# Altium PCB STM32F103C8T6_MinimumCoreBoard.PcbDoc
Units mil, origin at the board's own origin, x right, y up, seen from the top; angles counter-clockwise.
Board outline 1112.39 x 2027.75 mil, 2 copper layers (Top Layer, Bottom Layer); 35 components, 50 nets, 170 pads, 39 vias.
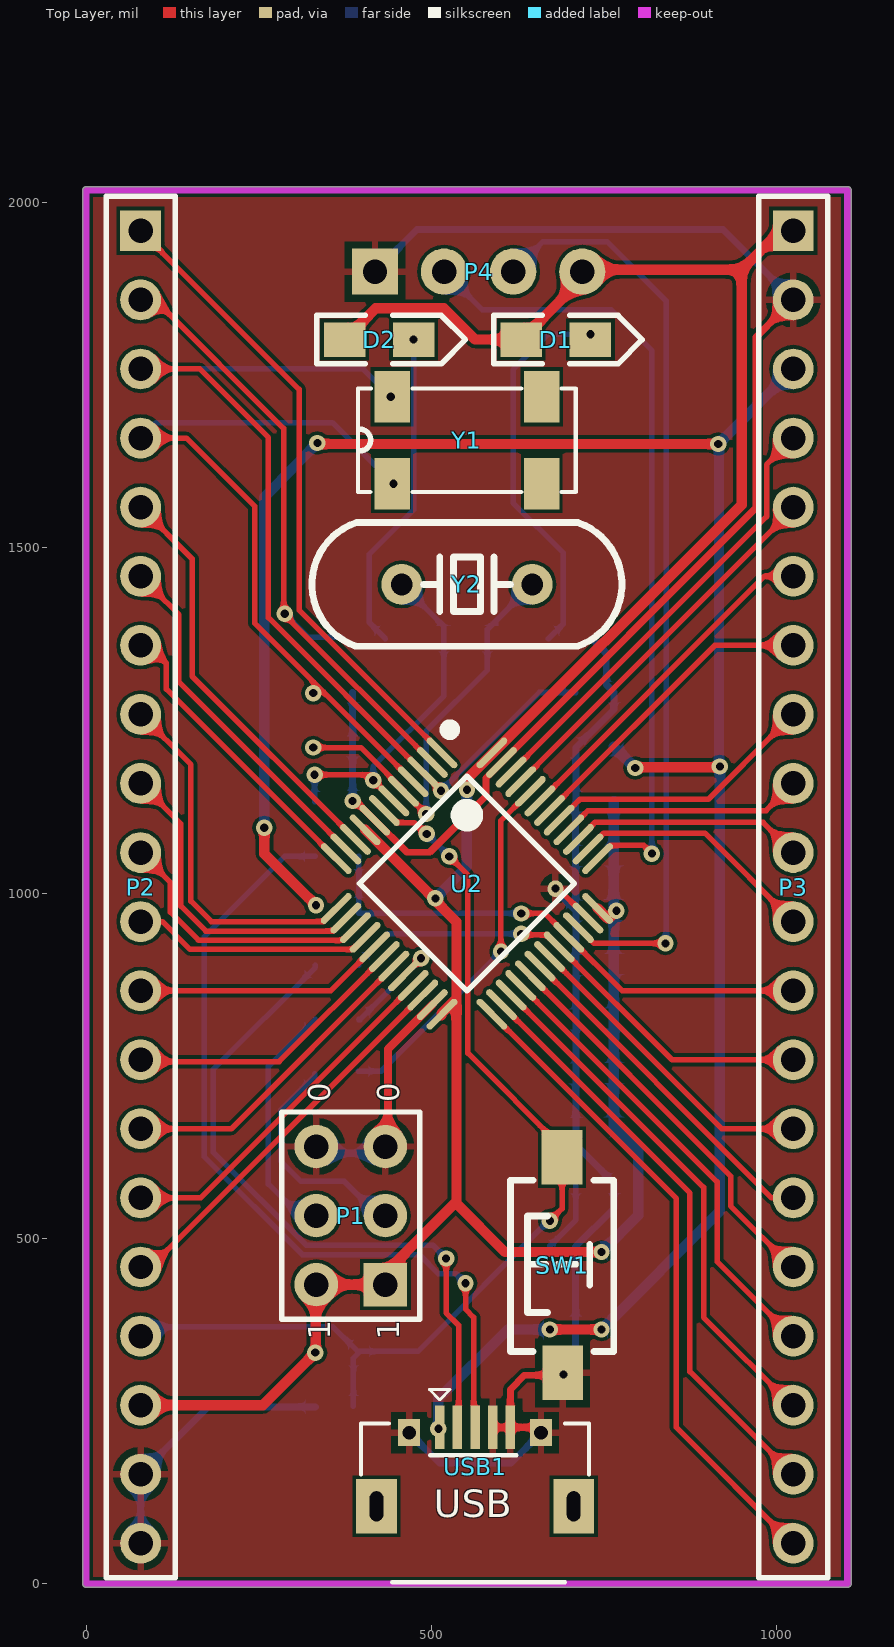
[diagram p0: Top Layer view]
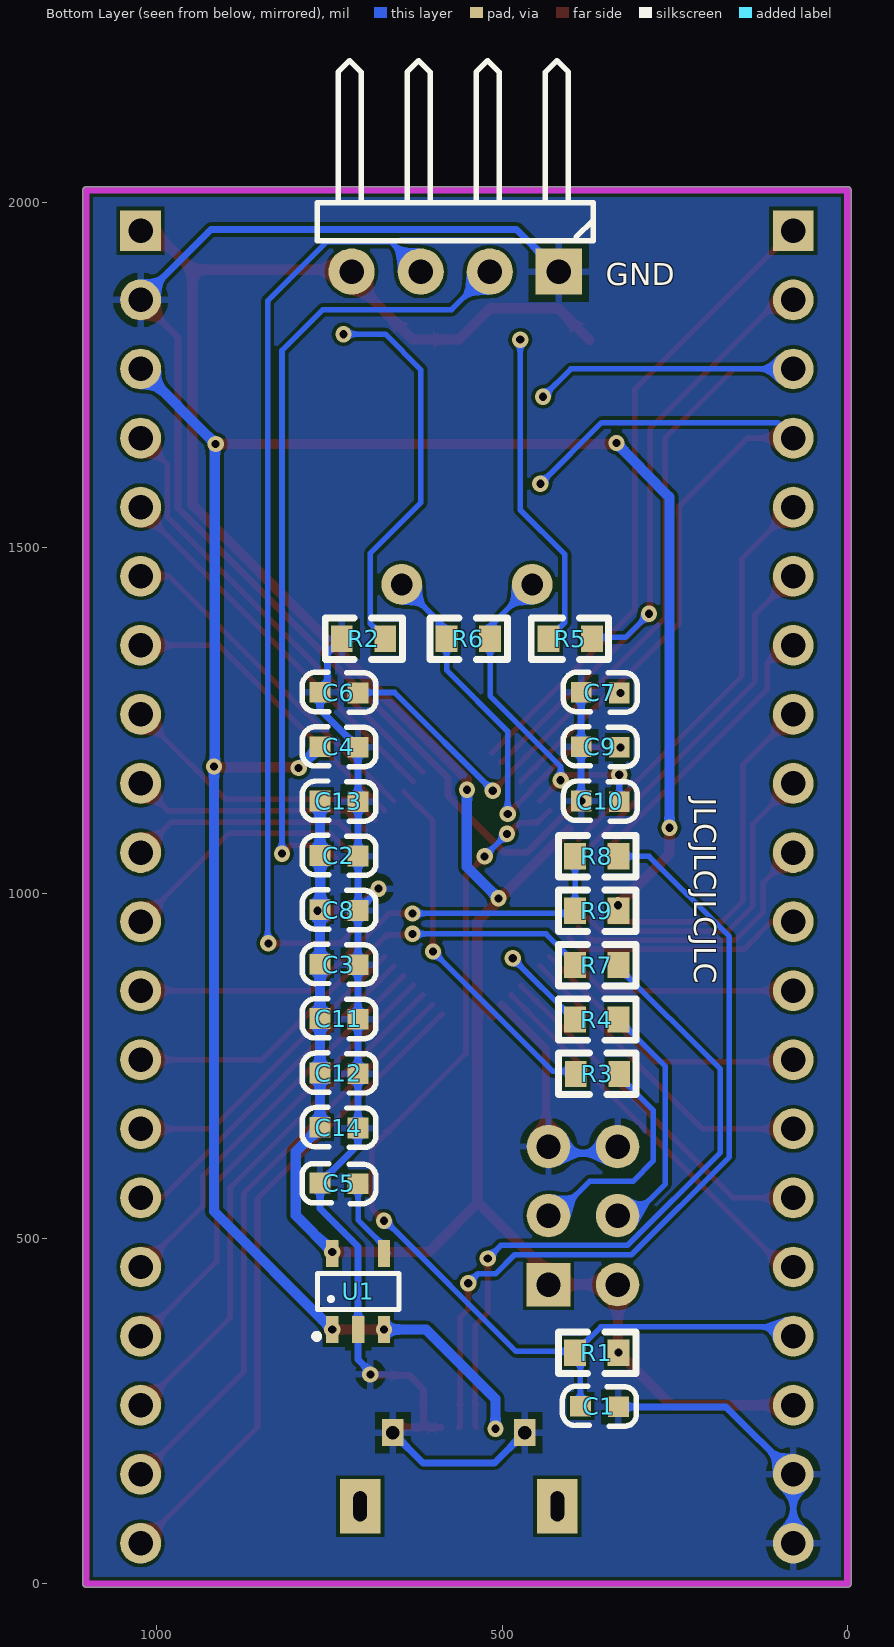
[diagram p1: Bottom Layer view, seen from below]

## Layer stack, top to bottom
Top Solder: solder mask 0.4, Solder Resist, Dk 3.5
Top Layer: signal copper 1.4
Dielectric 1: dielectric 12.6, FR-4, Dk 4.8
Bottom Layer: signal copper 1.4
Bottom Solder: solder mask 0.4, Solder Resist, Dk 3.5

## Board outline
0,-5.01 cw(c0,0) -5.01,0 -5.01,2017.72 cw(c0,2017.72) 0,2022.73 1102.36,2022.73 cw(c1102.36,2017.72) 1107.38,2017.72 1107.38,0 cw(c1102.36,0) 1102.36,-5.01

## Design rules (kind name [scope] priority, off if disabled: settings)
Clearance [All] p1: gap=5 ignorepadtopadclearanceinfootprint=TRUE
ComponentClearance ComponentClearance_1 [InComponent('OLED1')] p1: gap=0 collisioncheckmode=3 verticalgap=0 showdistances=FALSE
ComponentClearance [All] p2: gap=10 collisioncheckmode=3 verticalgap=10 showdistances=FALSE
DiffPairsRouting [All] p1: maxlimit=10 minlimit=3.5 mostfreqgap=8 toplayer_minwidth=3.5 toplayer_maxwidth=15 toplayer_prefwidth=8 bottomlayer_minwidth=3.5 bottomlayer_maxwidth=15 bottomlayer_prefwidth=8 maxuncoupledlength=500
MinimumSolderMaskSliver [All] p1: minsoldermaskwidth=0
PolygonConnect [All] p1: connectstyle=Relief reliefconductorwidth=10 reliefentries=4 polygonreliefangle="90 Angle" airgapwidth=10
RoutingVias [All] p1: holewidth=28 width=50 viastyle="Through Hole" minholewidth=11.81 minwidth=19.68 maxholewidth=248.03 maxwidth=50
SilkToSilkClearance [All] p1: silktosilkclearance=0
SilkToSolderMaskClearance [IsPad] p1: minsilkscreentomaskgap=0 clearancetoexposedcopper=TRUE
SolderMaskExpansion [All] p1: expansion=4
UnpouredPolygon [All] p1: allowunpoured=TRUE allowshelved=TRUE
Width [All] p1: maxlimit=15 minlimit=3.5 preferedwidth=8
24 further rules are at their usual default settings.

## Components (designator, comment, footprint, x,y, rotation, side; value= is the part's Value field where it differs from the comment)
C1 "1uF/0603" 0603C 331.69,255.91 r0 bottom
C2 "10uF/0603" 0603C 708.66,1053.15 r0 bottom
C3 "0.1uF/0603" 0603C 708.66,895.67 r0 bottom
C4 "1uF/0603" 0603C 708.66,1210.63 r0 bottom
C5 "22nF/0603" 0603C 764.02,580.71 r180 bottom
C6 "22pF/0603" 0603C 708.66,1289.37 r0 bottom
C7 "22pF/0603" 0603C 330.61,1289.37 r0 bottom
C8 "0.1uF/0603" 0603C 708.66,974.41 r0 bottom
C9 "22pF/0603" 0603C 330.61,1210.63 r0 bottom
C10 "22pF/0603" 0603C 330.5,1131.89 r0 bottom
C11 "1uF/0603" 0603C 708.66,816.93 r0 bottom
C12 "1uF/0603" 0603C 708.66,738.19 r0 bottom
C13 "1uF/0603" 0603C 708.66,1131.89 r0 bottom
C14 "1uF/0603" 0603C 708.66,659.45 r0 bottom
D1 "LEDR/0805" LED-0805R 629.92,1801.18 r0 top
D2 "LEDY/0805" LED-0805Y 374.02,1801.18 r0 top
P1 "Header 3X2" HDR-3X2 433.07,433.07 r90 top
P2 "Header 20" HDR1X20 78.74,1958.66 r270 top
P3 "Header 20" HDR1X20 1023.62,1958.66 r270 top
P4 "SWD" HDR-1X4_H 418.11,1899.61 r0 top
R1 "10K/0603" 0603R 331.69,334.65 r0 bottom
R2 "510R/0603" 0603R 669.29,1368.11 r0 bottom
R3 "10K/0603" 0603R 393.7,738.19 r180 bottom
R4 "10K/0603" 0603R 331.7,816.93 r0 bottom
R5 "510R/0603" 0603R 433.07,1368.11 r180 bottom
R6 "1M/0603" 0603R 517.72,1368.11 r0 bottom
R7 "20R/0603" 0603R 331.69,895.67 r0 bottom
R8 "20R/0603" 0603R 331.69,1053.15 r0 bottom
R9 "4.7K/0603" 0603R 331.69,974.41 r0 bottom
SW1 "SW-PB_V" "TSW SMD-3*6*2.5" 688.98,462.6 r90 top
U1 "RT9193" SOT23-5L 708.66,423.23 r180 bottom
U2 "STM32F103C8T6" "TQFP48 7x7_L" 551.18,1013.78 r225 top
USB1 "Micro-USB" USB-micro_B 511.81,226.38 r0 top
Y1 "32.768K" MC-306 551.18,1655.51 r0 top
Y2 "8M" "XTAL-49S DIP" 551.18,1446.85 r0 top

## Footprints (in the part's own frame and the unit in brackets; to place one, negate y for a bottom-side part, rotate by r counter-clockwise, add the part's x,y. Pads: shape width x height; smd on the part's side, far side on the other; paste and mask are expansions set on the pad)
0603C [mil]
  rect 30x30 smd: 1(0.21,-0.35) 2(55.21,-1.35)
  silkscreen extent -26,-30 81,28, body extent -1,-15 62,16, height 12
0603R [mm]
  rect 0.8x0.965 smd: 1(0,0) 2(1.6,0)
  silkscreen extent -0.64,-0.76 2.21,0.76, body extent -0.04,-0.41 1.56,0.41, height 0.45
HDR1X20 [mm] "Connector; Header; 20 Position"
  rect 1.5x1.5 hole 0.9: 1(0,0)
  round 1.5 hole 0.9: 2(2.54,0) 3(5.08,0) 4(7.62,0) 5(10.16,0) 6(12.7,0) 7(15.24,0) 8(17.78,0) 9(20.32,0) 10(22.86,0) 11(25.4,0) 12(27.94,0) 13(30.48,0) 14(33.02,0) 15(35.56,0) 16(38.1,0) 17(40.64,0) 18(43.18,0) 19(45.72,0) 20(48.26,0)
  silkscreen extent -1.27,-1.27 49.53,1.27
HDR-1X4_H [mm] "弯脚排针，4脚"
  rect 1.7x1.7 hole 0.9: 1(0,0)
  round 1.7 hole 0.9: 2(2.54,0) 3(5.08,0) 4(7.62,0)
  body extent -1.27,-1.27 8.89,7.77, height 4.85
HDR-3X2 [mm] "双排排针，3x2脚"
  rect 1.6x1.6 hole 0.9: 1(0,0)
  round 1.6 hole 0.9: 2(0,2.54) 3(2.54,0) 4(2.54,2.54) 5(5.08,0) 6(5.08,2.54)
  silkscreen extent -1.27,-1.27 6.35,3.81, body extent -1.27,-1.27 6.35,3.81, height 8.5
LED-0805R [mil]
  rect 60x50 smd: A(0,0) K(100,0)
  silkscreen extent -40,-35 175,35, body extent 11,-24 89,25, height 32
LED-0805Y [mil]
  rect 60x50 smd: A(0,0) K(100,0)
  silkscreen extent -40,-35 175,35, body extent 11,-26 89,23, height 32
MC-306 [mm]
  rect 1.3x1.9 smd: 1(-2.75,-1.6) 2(2.75,-1.6) 3(2.75,1.6) 4(-2.75,1.6)
  silkscreen extent -4,-1.9 4,1.9
SOT23-5L [mm] "3x1.6x1.1mm(长宽高)"
  rect 0.45x1 smd: 1(-0.95,-1.4) 2(0,-1.4) 3(0.95,-1.4) 4(0.95,1.4) 5(-0.95,1.4)
  silkscreen extent -1.6,-1.73 1.5,0.66, body extent -1.5,-1.4 1.5,1.4, height 1.15
"TQFP48 7x7_L" [mm] "48脚，体宽：7x7mm, 脚距：0.5mm"
  oval 0.25x1.5 smd: 1(-2.75,-4.046) 2(-2.25,-4.046) 3(-1.75,-4.046) 4(-1.25,-4.046) 5(-0.75,-4.046) 6(-0.25,-4.046) 7(0.25,-4.046) 8(0.75,-4.046) 9(1.25,-4.046) 10(1.75,-4.046) 11(2.25,-4.046) 12(2.75,-4.046) 25(2.75,4.046) 26(2.25,4.046) 27(1.75,4.046) 28(1.25,4.046) 29(0.75,4.046) 30(0.25,4.046) 31(-0.25,4.046) 32(-0.75,4.046) 33(-1.25,4.046) 34(-1.75,4.046) 35(-2.25,4.046) 36(-2.75,4.046)
  oval 1.5x0.25 smd: 13(4.046,-2.75) 14(4.046,-2.25) 15(4.046,-1.75) 16(4.046,-1.25) 17(4.046,-0.75) 18(4.046,-0.25) 19(4.046,0.25) 20(4.046,0.75) 21(4.046,1.25) 22(4.046,1.75) 23(4.046,2.25) 24(4.046,2.75) 37(-4.046,2.75) 38(-4.046,2.25) 39(-4.046,1.75) 40(-4.046,1.25) 41(-4.046,0.75) 42(-4.046,0.25) 43(-4.046,-0.25) 44(-4.046,-0.75) 45(-4.046,-1.25) 46(-4.046,-1.75) 47(-4.046,-2.25) 48(-4.046,-2.75)
  silkscreen extent -3.68,-4.57 2.79,2.79, body extent -4.5,-4.5 4.5,4.5, height 1.05
"TSW SMD-3*6*2.5" [mm] "3*6*2.5mm"
  rect 2x1.5 smd: 1(-3.996,-0.02) 2(3.937,0)
  silkscreen extent -3.21,-1.9 3.09,1.9, body extent -4,-1.88 4,1.62, height 2.59
USB-micro_B [mm]
  rect 1.5x2 hole 0.5 slot 1.1 at 90 deg: 0(-2.325,-2.9) 0(4.925,-2.9)
  rect 0.35x1.6 smd: 1(0,0) 2(0.65,0) 3(1.3,0) 4(1.95,0) 5(2.6,0)
  rect 0.8x1 hole 0.5: 5(-1.125,-0.19) 5(3.725,-0.19)
  silkscreen extent -2.89,-5.69 5.49,1.4, body extent -2.7,-5.6 5.3,0, height 2.8
"XTAL-49S DIP" [mm]
  round 1.5 hole 0.8: 1(-2.4,0) 2(2.4,0)
  silkscreen extent -5.7,-2.28 5.7,2.28, body extent -5.68,-2.35 5.68,2.3, height 3.5

## Part data
C1 C2 C3 C4 C5 C6 C7 C8 C9 C10 C11 C12 C13 C14: library part CAP, "无极性电容"
D1 D2: library part LED
P1: "Header, 3-Pin, Dual row", LatestRevisionDate=17-Jul-2002, LatestRevisionNote="Re-released for DXP Platform.", Publisher="Altium Limited"
P2 P3: "Header, 20-Pin", LatestRevisionDate=17-Jul-2002, LatestRevisionNote="Re-released for DXP Platform.", Publisher="Altium Limited"
P4: library part "Header 4", "Header, 4-Pin", LatestRevisionDate=17-Jul-2002, LatestRevisionNote="Re-released for DXP Platform.", Publisher="Altium Limited"
R1 R2 R3 R4 R5 R6 R7 R8 R9: library part RES
SW1: "SWITCH"
U1: library part RT9193X_5P, ICA_MFR_NAME=RICHTEK, ICA_PARTNUM=$$2191094$$RT9193-15CU5, Part Number=TMP-13
Y1 Y2: library part XTAL, "Crystal Oscillator", LatestRevisionDate=17-Jul-2002, LatestRevisionNote="Re-released for DXP Platform.", Published=8-Jun-2000, Publisher="Altium Limited"

## Via types
v1: diameter 23.62, hole 11.81, Top Layer to Bottom Layer, 39 vias

## Nets (pads, with @x,y where several pads share a name; then routed paths per layer and width w, separated by ;. In a path a pad name is that pad's centre, name@x,y a point inside that pad or via, vN(x,y) a via of type N, cw(c..) or ccw(c..) an arc to the next point about the centre after c; other vN are vias at no path point)
BOOT0: R3.1 U2.44 | length 528
  Top Layer w8: v1(600.39,915.35) 600.39,1104.75 U2.44
  Bottom Layer w8: R3.1@393.7,742.13 427.17,742.13 v1(600.39,915.35)
BOOT1: R4.2 U2.20 | length 162.9
  Top Layer w8: U2.20 459.62,880.26 v1(484.86,905.51)
  Bottom Layer w8: R4.2 396.48,816.93 484.86,905.31 v1(484.86,905.51)
GND: C1.1 C2.1 C3.1 C4.1 C5.1 C6.2 C7.2 C8.1 C9.2 C10.2 C11.1 C12.1 C13.1 C14.1 P1.5 P1.6 P2.19 P2.20 P3.2 P4.1 R2.2 SW1.1 U1.2 U2.8 U2.23 U2.35 U2.47 USB1.4 USB1.5 | length 4406.1
  Top Layer w8: v1(679.29,1006.38) 683.36,1006.38 725.96,963.78 U2.35
  Top Layer w10: v1(385.71,1133.24) 389.96,1133.24 U2.8 464.15,1059.06 497.39,1059.06 578.74,1140.41 578.74,1166.61 U2.47 969.29,1557.16 969.29,1804.33 P3.2@1003.94,1838.98 ; USB1.4 USB1.5@614.17,226.38 ; USB1.5@658.46,218.9 650.98,226.38 USB1.5@614.17,226.38 ; SW1.1@689.76,301.97 634.64,301.97 614.17,281.5 USB1.5@614.17,226.38
  Top Layer w11.81: P1.5@433.07,623.23 436.81,626.97 436.81,774.14 U2.23
  Bottom Layer w10: P2.20@78.74,56.3 P2.20 P2.19 176.34,256.26 C1.1 ; P1.6@333.07,623.23 P1.5@433.07,623.23 ; v1(385.71,1133.24) 385.83,1133.36 C9.2 C7.2 ; P4.1 479.13,1960.63 921.65,1960.63 P3.2 ; USB1.5@467.52,218.9 511.22,175.2 614.76,175.2 USB1.5@658.46,218.9 ; v1(679.29,1006.38) 678.27,1005.36 C8.1@708.57,975.07 ; v1(690.94,303.15) 689.1,304.99 708.66,324.55 708.66,346.33 U1.2 708.66,488 763.81,543.15 C5.1 708.87,635.29 C14.1 C12.1 C11.1 C3.1 C8.1 C8.1@708.57,975.07 ; R2.2 752.87,1347.52 752.87,1301.72 C6.2 763.87,1265.98 C4.1 C13.1 708.57,1131.94 C8.1@708.57,975.07
NetC5_2: C5.2 U1.4 | length 122.5
  Bottom Layer w8: U1.4@665.35,478.35 U1.4 671.26,489.17 708.81,526.72 C5.2
NetD1_K: D1.K R2.1 | length 561.9
  Bottom Layer w8: R2.1 690.94,1389.76 690.94,1492.13 618.11,1564.96 618.11,1757.87 669.29,1809.06 v1(729.92,1809.06)
NetD2_K: D2.K R5.1 | length 469.6
  Bottom Layer w8: R5.1 409.45,1391.73 409.45,1490.16 474.02,1554.72 v1(474.02,1801.18)
NetP1_3: P1.3 R3.2 | length 334.8
  Bottom Layer w8: R3.2 330.71,734.94 281.5,685.73 281.5,612.2 311.02,582.68 373.62,582.68 P1.3@433.07,523.23
NetP1_4: P1.4 R4.1 | length 344.3
  Bottom Layer w8: P1.4@318.9,523.62 263.78,578.74 263.78,749.01 R4.1
NetR7_1: R7.1 USB1.2 | length 985.6
  Top Layer w8: v1(521.09,471.04) 521.09,392.3 539.37,374.02 539.37,228.35 USB1.2
  Bottom Layer w8: R7.1 331.69,892.42 184.26,744.99 184.26,624.61 318.71,490.16 501.97,490.16 v1(521.09,471.04)
NetR8_1: R8.1 USB1.3 | length 1195.6
  Top Layer w8: v1(549.21,435.04) 549.21,397.64 561.02,385.83 561.02,228.35 USB1.3
  Bottom Layer w8: R8.1 287.4,1053.15 171.26,937.01 171.26,618.11 312.99,476.38 482.28,476.38 509.84,448.82 535.43,448.82 v1(549.21,435.04)
OSCIN: C9.1 R6.2 U2.5 Y2.2 | length 600.4
  Top Layer w8: v1(328.74,1210.63) 397.68,1210.63 459.42,1148.89 U2.5 492.13,1114.59 v1(492.13,1114.38)
  Bottom Layer w8: v1(492.13,1114.38) 492.13,1234.25 580.71,1322.83 R6.2 580.71,1381.89 Y2.2
OSCOUT: C10.1 R6.1 U2.6 Y2.1 | length 520.6
  Top Layer w8: v1(330.71,1171.26) 407.62,1171.26 v1(415.49,1163.39) U2.6
  Bottom Layer w8: C10.1 v1(330.71,1171.26) ; v1(415.49,1163.39) 415.49,1183.21 517.72,1285.43 R6.1 517.72,1385.83 Y2.1
PA0: P2.5 U2.10 | length 610
  Top Layer w8: P2.5 153.54,1483.86 153.54,1313.72 389.57,1077.7 U2.10
PA1: P2.6 U2.11 | length 490.1
  Top Layer w8: P2.6@98.43,1438.98 134.21,1403.19 134.21,1305.47 U2.11
PA2: P2.7 U2.12 | length 433.1
  Top Layer w8: P2.7 90.16,1358.66 116.14,1332.68 116.14,1295.21 361.49,1049.86 U2.12
PA3: P2.8 U2.13 | length 531.2
  Top Layer w8: P2.8 151.57,1185.83 151.57,988.19 181.1,958.66 342.95,958.66 U2.13
PA4: P2.9 U2.14 | length 463.4
  Top Layer w8: P2.9 137.17,1100.23 137.17,980.94 173.23,944.88 357.01,944.88 U2.14
PA5: P2.10 U2.15 | length 396.5
  Top Layer w8: P2.10 122.05,1015.35 122.05,972.44 162.61,931.88 205.52,931.88 205.86,931.54 371.51,931.54 U2.15
PA6: P2.11 U2.16 | length 348.8
  Top Layer w8: P2.11 110.24,958.66 150.36,918.54 386.35,918.54 U2.16
PA7: P2.12 U2.17 | length 365.2
  Top Layer w8: P2.12 354.3,858.66 U2.17
PA8: P3.16 U2.29 | length 579.9
  Top Layer w8: U2.29 933.07,590.13 933.07,547.24 P3.16@1022.64,457.68
PA9: P3.15 U2.30 | length 505.7
  Top Layer w8: U2.30 992.38,558.66 P3.15
PA10: P3.14 U2.31 | length 456.2
  Top Layer w8: U2.31 920.22,658.66 P3.14
PA11: P3.13 R7.2 U2.32 | length 725.1
  Top Layer w8: v1(629.92,940.94) 631.44,939.42 667.3,939.42 U2.32 848.06,758.66 P3.13
  Bottom Layer w8: R7.2 394.68,898.92 436.71,940.94 v1(629.92,940.94)
PA12: P3.12 R8.2 R9.2 U2.33 | length 753.9
  Top Layer w8: v1@631.89,970.47 664.09,970.47 U2.33 775.9,858.66 P3.12
  Bottom Layer w8: R9.2 394.68,970.47 v1(629.92,970.47) ; R9.2@394.68,976.44 R8.2
PA15: P3.11 U2.38 | length 384.5
  Top Layer w8: U2.38 739.45,1076.77 749.29,1086.61 895.67,1086.61 P3.11 P3.11@1023.62,933.77
PB0: P2.13 U2.18 | length 415.9
  Top Layer w8: P2.13@78.74,755.91 279.39,755.91 U2.18
PB1: P2.14 U2.19 | length 464.3
  Top Layer w8: P2.14 209.98,658.66 U2.19
PB3: P3.10 U2.39 | length 366.2
  Top Layer w8: U2.39@731.29,1096.46 U2.39 712.54,1078.2 731.04,1096.71 736.7,1102.36 979.92,1102.36 P3.10
PB4: P3.9 U2.40 | length 352.8
  Top Layer w8: U2.40 715.27,1108.27 726.29,1119.29 984.25,1119.29 P3.9
PB5: P3.8 U2.41 | length 374.5
  Top Layer w8: U2.41 707.11,1127.95 714.99,1135.83 900.79,1135.83 P3.8@1003.94,1238.98
PB6: P3.7 U2.42 | length 451.9
  Top Layer w8: U2.42 909.98,1358.66 P3.7
PB7: P3.6 U2.43 | length 501.5
  Top Layer w8: U2.43 982.14,1458.66 P3.6
PB8: P3.5 U2.45 | length 532.2
  Top Layer w8: U2.45 P3.5@1005.36,1537.55
PB9: P3.4 U2.46 | length 624.9
  Top Layer w8: U2.46 985.09,1545.13 985.09,1620.13 P3.4@1003.94,1638.98
PB10: P2.15 U2.21 | length 522.1
  Top Layer w8: P2.15 165.66,558.66 U2.21
PB11: P2.16 U2.22 | length 577.7
  Top Layer w8: P2.16@78.74,443.93 U2.22@487.24,852.43
PB12: P3.20 U2.25 | length 947.1
  Top Layer w8: U2.25 854.33,557.52 854.33,226.38 P3.20@1022.83,57.87
PB13: P3.19 U2.26 | length 855.2
  Top Layer w8: U2.26 874.02,565.67 874.02,307.09 P3.19@1023.03,158.07
PB14: P3.18 U2.27 | length 763.8
  Top Layer w8: U2.27 893.7,573.82 893.7,385.83 P3.18@1022.24,257.28
PB15: P3.17 U2.28 | length 671.8
  Top Layer w8: U2.28 913.39,581.98 913.39,466.54 P3.17@1022.44,357.48
PC13: P2.2 R5.2 U2.2 | length 954.8
  Top Layer w8: P2.2 100,1858.66 285.97,1672.69 285.97,1404.27 U2.2 U2.2@502.28,1189.05
  Bottom Layer w8: v1(287.54,1404.29) 321.75,1370.08 R5.2@370.08,1370.08
PC14: C6.1 P2.3 U2.3 Y1.4 | length 1473.8
  Top Layer w8: P2.3 164.57,1758.66 263.78,1659.45 263.78,1398.62 U2.3 487.26,1174.63 v1(513.78,1148.12)
  Bottom Layer w8: P2.3 400.79,1758.66 v1(440.94,1718.5) ; v1(513.78,1148.12) 656,1290.34 C6.1@708.78,1290.34
PC15: C7.1 P2.4 U2.4 Y1.1 | length 1124.4
  Top Layer w8: P2.4 145.19,1658.66 244.16,1559.7 244.16,1546.6 244.09,1546.54 244.09,1390.46 v1@336.96,1297.59 ; v1(328.74,1289.37) v1@336.96,1297.59 ; U2.4@472.79,1161.77 U2.4 v1@336.96,1297.59
  Bottom Layer w8: P2.4 101.18,1681.1 356.3,1681.1 v1(444.88,1592.52)
RESET: C1.2 P2.17 R1.2 SW1.2 U2.7 | length 1497.3
  Top Layer w8: U2.7 448.99,1102.05 475.02,1102.05 491.45,1085.63 v1(493.11,1085.63) ; v1(525.59,1053.15) 552.5,1026.24 552.5,768.36 688.98,631.89 SW1.2 688.98,543.31 v1(671.26,525.59)
  Bottom Layer w8: P2.17 92.13,372.05 357.28,372.05 R1.2 ; C1.2 386.91,326.87 R1.2 ; v1(493.11,1085.63) v1(525.59,1053.15) ; v1(671.26,525.59) 669.19,525.59 480.22,336.61 396.65,336.61 R1.2
SWDCLK: P4.2 U2.37 | length 1167.7
  Top Layer w8: U2.37 759.41,1068.9 807.09,1068.9 v1(818.9,1057.09)
  Bottom Layer w8: P4.2 573.23,1844.49 759.84,1844.49 818.9,1785.43 v1(818.9,1057.09)
SWDIO: P4.3 U2.34 | length 1341
  Top Layer w8: U2.34 735.23,927.17 v1(838.58,927.17)
  Bottom Layer w8: P4.3 661.42,1942.91 753.94,1942.91 839.71,1857.14 839.71,928.29 v1(838.58,927.17)
VBAT: P2.1 U2.1 | length 908.6
  Top Layer w8: P2.1@98.43,1938.98 308.35,1729.05 308.35,1409.72 U2.1
VBUS: C4.2 P3.3 R9.1 U1.1 U1.3 USB1.1 | length 3308.1
  Top Layer w15: v1(257.87,1094.49) 257.87,1057.08 v1(332.68,982.28) ; v1(334.65,1651.57) 336.22,1650 v1(914.96,1650) ; v1(671.26,368.11) v1(746.06,368.11) ; v1(794.76,1181.1) 795.74,1182.09 916.34,1182.09 v1(917.32,1183.07)
  Bottom Layer w15: v1(257.87,1094.49) 257.87,1572.89 263.78,1578.79 v1(334.65,1651.57) ; v1(509.84,224.41) 509.84,267.72 610.24,368.11 v1(671.26,368.11) ; v1(746.06,368.11) 917.32,539.37 v1(917.32,1183.07) 916.14,1184.25 916.14,1648.82 v1(914.96,1650) P3.3 ; C4.2 v1(794.76,1181.1)
VCC3V3: C2.2 C3.2 C8.2 C11.2 C12.2 C13.2 C14.2 D1.A D2.A P1.1 P1.2 P2.18 P3.1 P4.4 R1.1 U1.5 U2.9 U2.24 U2.36 U2.48 | length 4100.2
  Top Layer w15: P2.18 255.71,258.66 v1(331.69,334.65) 332.38,335.33 332.38,432.38 P1.2 431.1,433.07 433.07,431.1 P1.1 433.07,450.04 536,552.97 U2.24@536,844.49 ; D2.A 419.29,1846.46 517.72,1846.46 562.92,1801.25 629.85,1801.25 718.11,1889.52 P4.4 720.98,1902.48 948.82,1902.48 ; U2.9 503.06,992.3 v1(505.56,992.3) 505.56,988.77 536,958.32 536,846.85 514.35,825.2 U2.24@514.35,822.83 ; 536,550.61 606.3,480.32 v1(746.06,480.32) ; v1(551.18,1149.61) 551.18,1164.6 948.82,1562.23 948.82,1902.48 ; U2.36 754.66,963.41 755.87,963.41 766.86,974.41 v1(767.5,974.41) ; P3.1 1005,1958.66 948.82,1902.48
  Bottom Layer w15: v1(505.56,992.3) 551.18,1037.93 v1(551.18,1149.61) ; v1(746.06,480.32) 799.21,533.46 799.21,625.46 C14.2 C12.2 C11.2 C3.2 C8.2 ; C13.2 C2.2 763.87,1053.1 763.57,1052.8 763.57,976.07 C8.2 ; v1(767.5,974.41) 767.5,972.14 C8.2
pads on no net: USB1.0 Y1.2 Y1.3

## Polygon pours and split planes (outlines as drawn)
GND on Top Layer "Top Layer-No Net" (solid, pour order 42): 0,-5.01 cw(c0,0) -5.01,0 -5.01,2017.72 cw(c0,2017.72) 0,2022.73 1102.36,2022.73 cw(c1102.36,2017.72) 1107.38,2017.72 1107.38,0 cw(c1102.36,0) 1102.36,-5.01
GND on Bottom Layer "Top Layer-No Net1" (solid, pour order 43): 0,-5.01 cw(c0,0) -5.01,0 -5.01,2017.72 cw(c0,2017.72) 0,2022.73 1102.36,2022.73 cw(c1102.36,2017.72) 1107.38,2017.72 1107.38,0 cw(c1102.36,0) 1102.36,-5.01

## Keep-outs
Keep-Out Layer:
  lines w10: 0,0 1102.36,0 1102.36,2017.72 0,2017.72 0,0

## Silkscreen, mask and mechanical layers (free items; w line width, h text height)
Bottom Overlay:
  text "GND" at 350.39,1879.92 h31.5
  text "JLCJLCJLCJLC" at 222.44,1137.8 h31.5 r90

## Text inside footprints (layer, text, board x,y; h text height)
P1: Top Overlay "1" at 453.07,353.07 h32 r90; Top Overlay "1" at 353.07,353.07 h32 r90; Top Overlay "0" at 453.07,696.85 h32 r90; Top Overlay "0" at 353.07,696.85 h32 r90
USB1: Top Overlay "USB" at 502.99,96.38 h40